# EAGLE board SparkFun_Pi_Wedge_40-Pin_PreAssembled_Panel_v10 (EAGLE 7.5.0), part 1 of 2
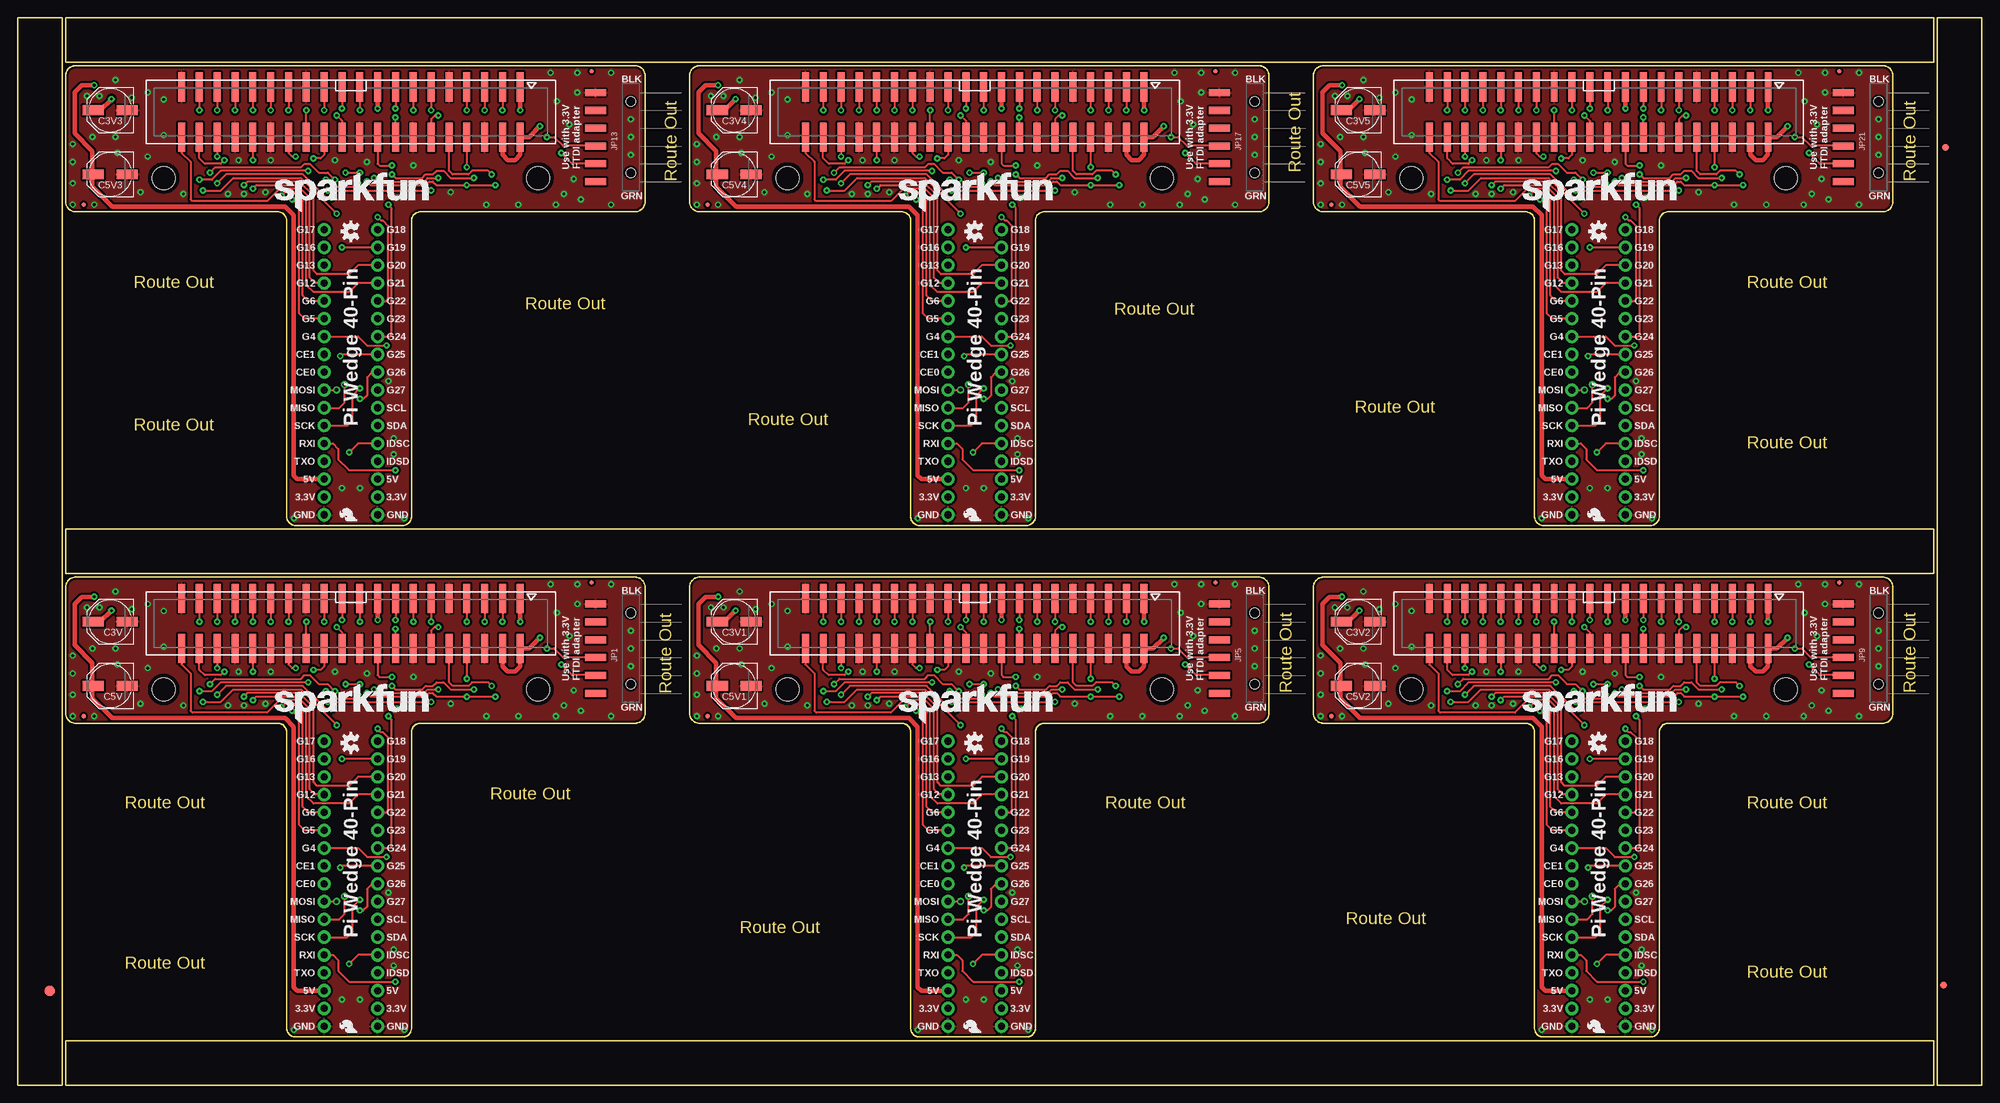
[diagram p0: board, top side]
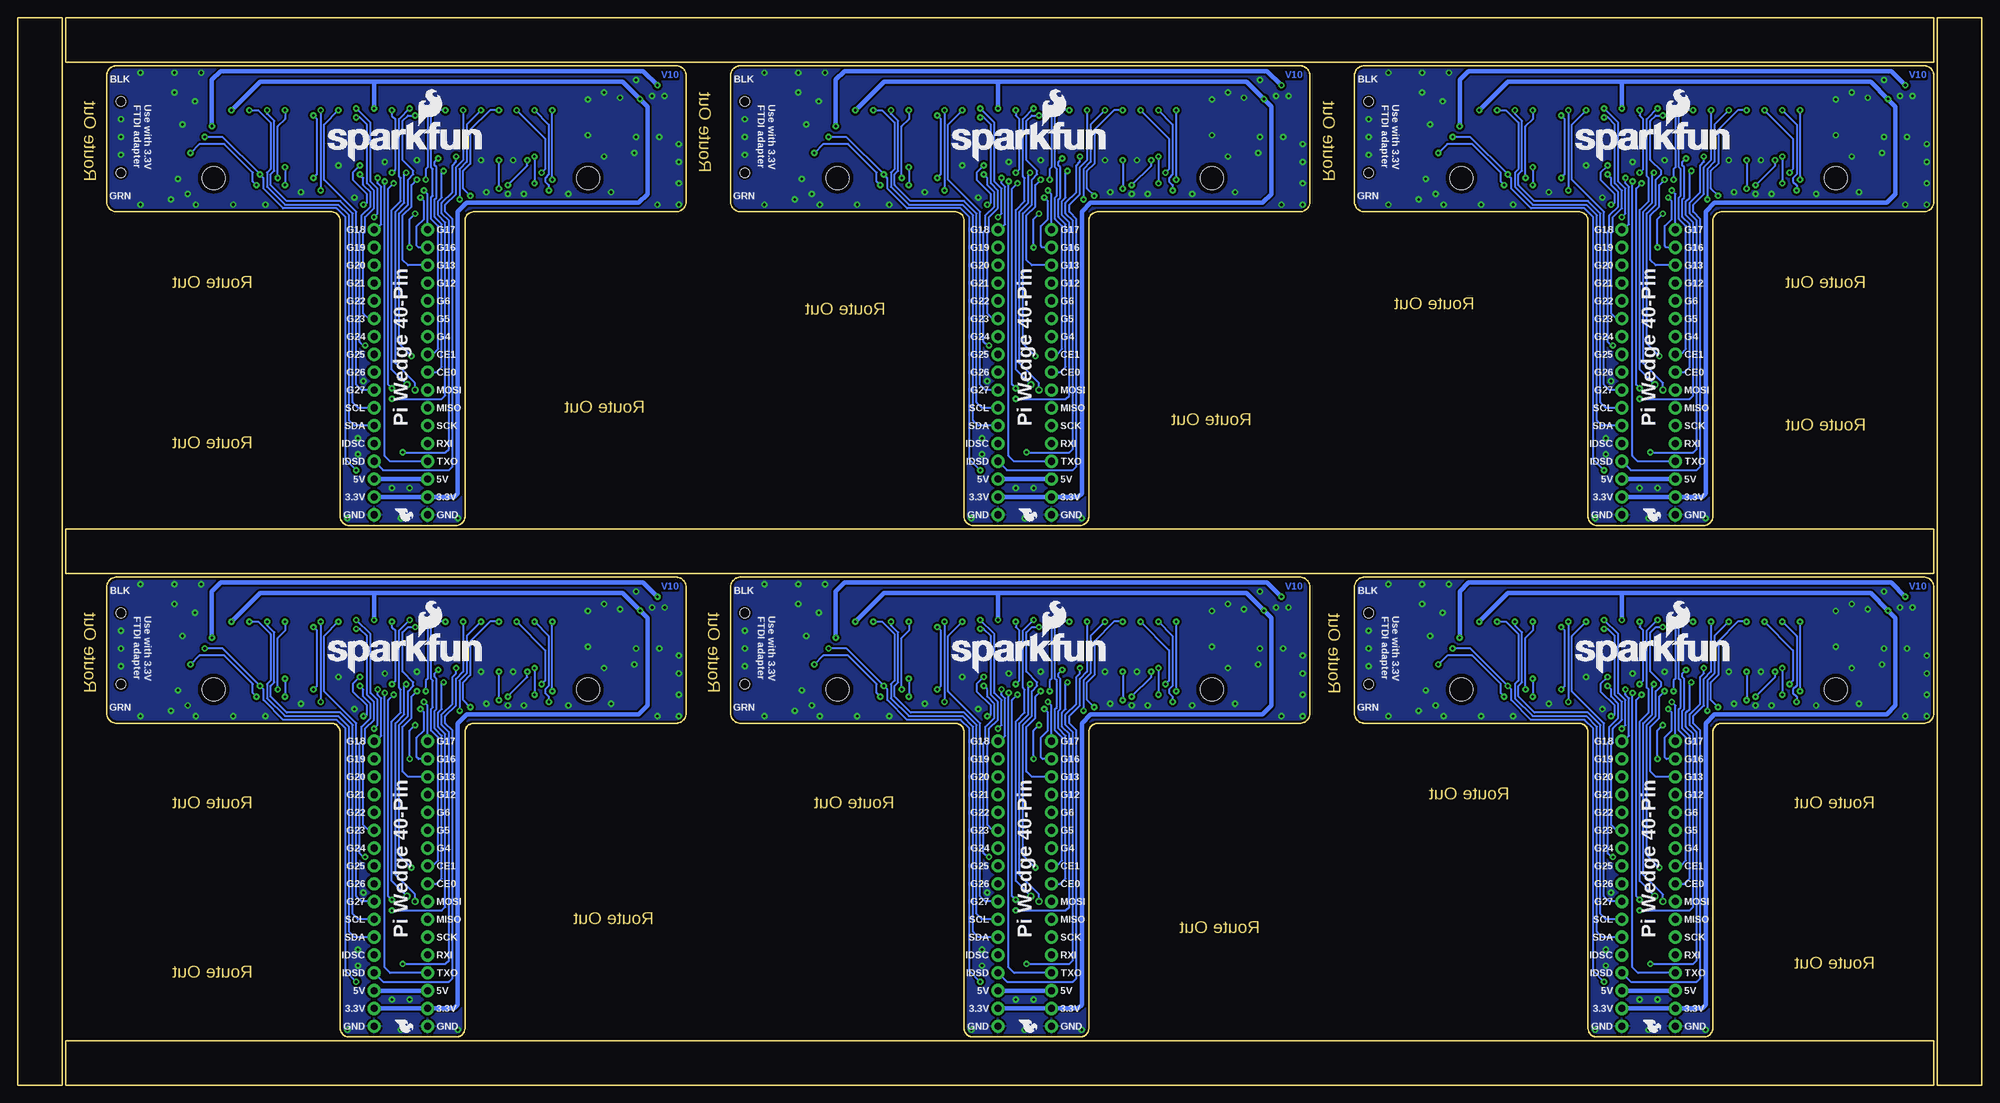
[diagram p1: board, bottom side, seen from below]

Size 279.91 x 152.15 mm. Coordinates in mm from the lower left corner, seen from the top.
Outline: 6.35,109.22 6.35,0 0,0 0,59.69
Outline: 0,57.15 0,152.15 6.35,152.15 6.35,106.68
Outline: 100.08,0 6.86,0 6.86,6.35 50.55,6.35
Outline: 48.01,6.35 273.05,6.35 273.05,0 97.54,0
Outline: 273.56,52.58 273.56,152.15 279.91,152.15 279.91,102.11
Outline: 279.91,104.65 279.91,0 273.56,0 273.56,55.12
Outline: 194.82,152.15 273.05,152.15 273.05,145.8 244.35,145.8
Outline: 246.89,145.8 6.86,145.8 6.86,152.15 197.36,152.15
Outline: 100.08,72.9 6.86,72.9 6.86,79.25 50.55,79.25
Outline: 48.01,79.25 273.05,79.25 273.05,72.9 97.54,72.9
Outline: 89.41,70.95 89.41,53 arc-90 87.97,51.56 57.4,51.56 arc90 56.13,50.29 56.13,8.13 arc-90 54.86,6.86 39.62,6.86 arc-90 38.35,8.13 38.35,50.29 arc90 37.08,51.56 8.29,51.56 arc-90 6.86,53 6.86,70.95 arc-90 8.29,72.39 87.97,72.39 arc-90 89.41,70.95
Outline: 178.31,70.95 178.31,53 arc-90 176.87,51.56 146.3,51.56 arc90 145.03,50.29 145.03,8.13 arc-90 143.76,6.86 128.52,6.86 arc-90 127.25,8.13 127.25,50.29 arc90 125.98,51.56 97.19,51.56 arc-90 95.76,53 95.76,70.95 arc-90 97.19,72.39 176.87,72.39 arc-90 178.31,70.95
Outline: 267.21,70.95 267.21,53 arc-90 265.77,51.56 235.2,51.56 arc90 233.93,50.29 233.93,8.13 arc-90 232.66,6.86 217.42,6.86 arc-90 216.15,8.13 216.15,50.29 arc90 214.88,51.56 186.09,51.56 arc-90 184.66,53 184.66,70.95 arc-90 186.09,72.39 265.77,72.39 arc-90 267.21,70.95
Outline: 89.41,143.85 89.41,125.9 arc-90 87.97,124.46 57.4,124.46 arc90 56.13,123.19 56.13,81.03 arc-90 54.86,79.76 39.62,79.76 arc-90 38.35,81.03 38.35,123.19 arc90 37.08,124.46 8.29,124.46 arc-90 6.86,125.9 6.86,143.85 arc-90 8.29,145.29 87.97,145.29 arc-90 89.41,143.85
Outline: 178.31,143.85 178.31,125.9 arc-90 176.87,124.46 146.3,124.46 arc90 145.03,123.19 145.03,81.03 arc-90 143.76,79.76 128.52,79.76 arc-90 127.25,81.03 127.25,123.19 arc90 125.98,124.46 97.19,124.46 arc-90 95.76,125.9 95.76,143.85 arc-90 97.19,145.29 176.87,145.29 arc-90 178.31,143.85
Outline: 267.21,143.85 267.21,125.9 arc-90 265.77,124.46 235.2,124.46 arc90 233.93,123.19 233.93,81.03 arc-90 232.66,79.76 217.42,79.76 arc-90 216.15,81.03 216.15,123.19 arc90 214.88,124.46 186.09,124.46 arc-90 184.66,125.9 184.66,143.85 arc-90 186.09,145.29 265.77,145.29 arc-90 267.21,143.85
Copper layers (1*16): Top 0.035mm / dielectric 1.5mm / Bottom 0.035mm
Design rules "SparkFun-2-layer": minimum track width 7mil, minimum drill 15mil, track to track 8mil, track to pad 8mil, pad to pad 8mil, via to via 8mil, smd to smd 8mil, copper to edge 8mil, drill to drill 8mil, minimum pad ring 12mil, minimum via ring 10mil, stop-mask expansion 4mil, vias tented up to drill 20mil, thermal gap 10mil

## Footprints (pad centres in the part's own frame; a part is rotated, then mirrored left to right if it is on the bottom)
PANASONIC_D = smd 3 x 1.4: + 2.4,0; - -2.4,0
FIDUCIAL-1.5X3 = smd 1.5 x 1.5: 1 0,0
FIDUCIAL-1X2 = smd 1 x 1: 1 0,0
MICRO-FIDUCIAL = smd 0.635 x 0.635: 1 0,0
FTDI_DEVICE_RA_SMT = smd 1 x 3: 1 -6.35,5; 2 -3.81,5; 3 -1.27,5; 4 1.27,5; 5 3.81,5; 6 6.35,5 | hole 1.4: -5.08,0; 5.08,0
2X20-SHROUDED-SMT = smd 4.14 x 0.991: 1 -3.569,24.13; 2 3.569,24.13; 3 -3.569,21.59; 4 3.569,21.59; 5 -3.569,19.05; 6 3.569,19.05; 7 -3.569,16.51; 8 3.569,16.51; 9 -3.569,13.97; 10 3.569,13.97; 11 -3.569,11.43; 12 3.569,11.43; 13 -3.569,8.89; 14 3.569,8.89; 15 -3.569,6.35; 16 3.569,6.35; 17 -3.569,3.81; 18 3.569,3.81; 19 -3.569,1.27; 20 3.569,1.27; 21 -3.569,-1.27; 22 3.569,-1.27; 23 -3.569,-3.81; 24 3.569,-3.81; 25 -3.569,-6.35; 26 3.569,-6.35; 27 -3.569,-8.89; 28 3.569,-8.89; 29 -3.569,-11.43; 30 3.569,-11.43; 31 -3.569,-13.97; 32 3.569,-13.97; 33 -3.569,-16.51; 34 3.569,-16.51; 35 -3.569,-19.05; 36 3.569,-19.05; 37 -3.569,-21.59; 38 3.569,-21.59; 39 -3.569,-24.13; 40 3.569,-24.13
1X17_NO_SILK_KIT = drill 1.016 pad 1.88: 1 0,0; 2 2.54,0; 3 5.08,0; 4 7.62,0; 5 10.16,0; 6 12.7,0; 7 15.24,0; 8 17.78,0; 9 20.32,0; 10 22.86,0; 11 25.4,0; 12 27.94,0; 13 30.48,0; 14 33.02,0; 15 35.56,0; 16 38.1,0; 17 40.64,0
STAND-OFF = hole 3.302: 0,0

## Placement (x,y rotation side)
C3V  10uf  [PANASONIC_D]  13.21,66.04 180 top
C3V1  10uf  [PANASONIC_D]  102.11,66.04 180 top
C3V2  10uf  [PANASONIC_D]  191.01,66.04 180 top
C3V3  10uf  [PANASONIC_D]  13.21,138.94 180 top
C3V4  10uf  [PANASONIC_D]  102.11,138.94 180 top
C3V5  10uf  [PANASONIC_D]  191.01,138.94 180 top
C5V  10uf  [PANASONIC_D]  13.21,56.9 180 top
C5V1  10uf  [PANASONIC_D]  102.11,56.9 180 top
C5V2  10uf  [PANASONIC_D]  191.01,56.9 180 top
C5V3  10uf  [PANASONIC_D]  13.21,129.79 180 top
C5V4  10uf  [PANASONIC_D]  102.11,129.79 180 top
C5V5  10uf  [PANASONIC_D]  191.01,129.79 180 top
E$1  [FIDUCIAL-1.5X3]  4.57,13.46 0 top
E$5  [FIDUCIAL-1X2]  274.7,133.6 180 top
E$6  [FIDUCIAL-1X2]  274.45,14.22 0 top
FID1  FIDUCIALUFIDUCIAL  [MICRO-FIDUCIAL]  81.79,71.63 0 top
FID2  FIDUCIALUFIDUCIAL  [MICRO-FIDUCIAL]  9.4,52.58 0 top
FID3  FIDUCIALUFIDUCIAL  [MICRO-FIDUCIAL]  170.69,71.63 0 top
FID4  FIDUCIALUFIDUCIAL  [MICRO-FIDUCIAL]  98.3,52.58 0 top
FID5  FIDUCIALUFIDUCIAL  [MICRO-FIDUCIAL]  259.59,71.63 0 top
FID6  FIDUCIALUFIDUCIAL  [MICRO-FIDUCIAL]  187.2,52.58 0 top
FID7  FIDUCIALUFIDUCIAL  [MICRO-FIDUCIAL]  81.79,144.53 0 top
FID8  FIDUCIALUFIDUCIAL  [MICRO-FIDUCIAL]  9.4,125.48 0 top
FID9  FIDUCIALUFIDUCIAL  [MICRO-FIDUCIAL]  170.69,144.53 0 top
FID10  FIDUCIALUFIDUCIAL  [MICRO-FIDUCIAL]  98.3,125.48 0 top
FID11  FIDUCIALUFIDUCIAL  [MICRO-FIDUCIAL]  259.59,144.53 0 top
FID12  FIDUCIALUFIDUCIAL  [MICRO-FIDUCIAL]  187.2,125.48 0 top
JP1  FTDI Device  [FTDI_DEVICE_RA_SMT]  87.38,62.2 90 top
JP2  RASPBERRYPI-40-PIN-GPIO-SMT  [2X20-SHROUDED-SMT]  47.5,65.79 270 top
JP3  1x17  [1X17_NO_SILK_KIT]  43.69,8.38 90 bottom
JP4  1x17  [1X17_NO_SILK_KIT]  51.31,8.38 90 bottom
JP5  FTDI Device  [FTDI_DEVICE_RA_SMT]  176.28,62.2 90 top
JP6  RASPBERRYPI-40-PIN-GPIO-SMT  [2X20-SHROUDED-SMT]  136.4,65.79 270 top
JP7  1x17  [1X17_NO_SILK_KIT]  132.59,8.38 90 bottom
JP8  1x17  [1X17_NO_SILK_KIT]  140.21,8.38 90 bottom
JP9  FTDI Device  [FTDI_DEVICE_RA_SMT]  265.18,62.2 90 top
JP10  RASPBERRYPI-40-PIN-GPIO-SMT  [2X20-SHROUDED-SMT]  225.3,65.79 270 top
JP11  1x17  [1X17_NO_SILK_KIT]  221.49,8.38 90 bottom
JP12  1x17  [1X17_NO_SILK_KIT]  229.11,8.38 90 bottom
JP13  FTDI Device  [FTDI_DEVICE_RA_SMT]  87.38,135.1 90 top
JP14  RASPBERRYPI-40-PIN-GPIO-SMT  [2X20-SHROUDED-SMT]  47.5,138.68 270 top
JP15  1x17  [1X17_NO_SILK_KIT]  43.69,81.28 90 bottom
JP16  1x17  [1X17_NO_SILK_KIT]  51.31,81.28 90 bottom
JP17  FTDI Device  [FTDI_DEVICE_RA_SMT]  176.28,135.1 90 top
JP18  RASPBERRYPI-40-PIN-GPIO-SMT  [2X20-SHROUDED-SMT]  136.4,138.68 270 top
JP19  1x17  [1X17_NO_SILK_KIT]  132.59,81.28 90 bottom
JP20  1x17  [1X17_NO_SILK_KIT]  140.21,81.28 90 bottom
JP21  FTDI Device  [FTDI_DEVICE_RA_SMT]  265.18,135.1 90 top
JP22  RASPBERRYPI-40-PIN-GPIO-SMT  [2X20-SHROUDED-SMT]  225.3,138.68 270 top
JP23  1x17  [1X17_NO_SILK_KIT]  221.49,81.28 90 bottom
JP24  1x17  [1X17_NO_SILK_KIT]  229.11,81.28 90 bottom
LOGO1  SFE_LOGO_NAME.2_INCH  [SFE_LOGO_NAME_.2]  36.7,51.56 0 top
LOGO2  SFE_LOGO_NAME_FLAME.2_INCH  [SFE_LOGO_NAME_FLAME_.2]  58.55,58.67 0 bottom
LOGO3  SFE_LOGO_FLAME.1_INCH  [SFE_LOGO_FLAME_.1]  48.77,7.24 90 top
LOGO4  SFE_LOGO_FLAME.1_INCH  [SFE_LOGO_FLAME_.1]  48.64,9.53 270 bottom
LOGO5  OSHW-LOGOS  [OSHW-LOGO-S]  47.5,48.77 90 top
LOGO6  SFE_LOGO_NAME.2_INCH  [SFE_LOGO_NAME_.2]  125.6,51.56 0 top
LOGO7  SFE_LOGO_NAME_FLAME.2_INCH  [SFE_LOGO_NAME_FLAME_.2]  147.45,58.67 0 bottom
LOGO8  SFE_LOGO_FLAME.1_INCH  [SFE_LOGO_FLAME_.1]  137.67,7.24 90 top
LOGO9  SFE_LOGO_FLAME.1_INCH  [SFE_LOGO_FLAME_.1]  137.54,9.53 270 bottom
LOGO10  OSHW-LOGOS  [OSHW-LOGO-S]  136.4,48.77 90 top
LOGO11  SFE_LOGO_NAME.2_INCH  [SFE_LOGO_NAME_.2]  214.5,51.56 0 top
LOGO12  SFE_LOGO_NAME_FLAME.2_INCH  [SFE_LOGO_NAME_FLAME_.2]  236.35,58.67 0 bottom
LOGO13  SFE_LOGO_FLAME.1_INCH  [SFE_LOGO_FLAME_.1]  226.57,7.24 90 top
LOGO14  SFE_LOGO_FLAME.1_INCH  [SFE_LOGO_FLAME_.1]  226.44,9.53 270 bottom
LOGO15  OSHW-LOGOS  [OSHW-LOGO-S]  225.3,48.77 90 top
LOGO16  SFE_LOGO_NAME.2_INCH  [SFE_LOGO_NAME_.2]  36.7,124.46 0 top
LOGO17  SFE_LOGO_NAME_FLAME.2_INCH  [SFE_LOGO_NAME_FLAME_.2]  58.55,131.57 0 bottom
LOGO18  SFE_LOGO_FLAME.1_INCH  [SFE_LOGO_FLAME_.1]  48.77,80.14 90 top
LOGO19  SFE_LOGO_FLAME.1_INCH  [SFE_LOGO_FLAME_.1]  48.64,82.42 270 bottom
LOGO20  OSHW-LOGOS  [OSHW-LOGO-S]  47.5,121.67 90 top
LOGO21  SFE_LOGO_NAME.2_INCH  [SFE_LOGO_NAME_.2]  125.6,124.46 0 top
LOGO22  SFE_LOGO_NAME_FLAME.2_INCH  [SFE_LOGO_NAME_FLAME_.2]  147.45,131.57 0 bottom
LOGO23  SFE_LOGO_FLAME.1_INCH  [SFE_LOGO_FLAME_.1]  137.67,80.14 90 top
LOGO24  SFE_LOGO_FLAME.1_INCH  [SFE_LOGO_FLAME_.1]  137.54,82.42 270 bottom
LOGO25  OSHW-LOGOS  [OSHW-LOGO-S]  136.4,121.67 90 top
LOGO26  SFE_LOGO_NAME.2_INCH  [SFE_LOGO_NAME_.2]  214.5,124.46 0 top
LOGO27  SFE_LOGO_NAME_FLAME.2_INCH  [SFE_LOGO_NAME_FLAME_.2]  236.35,131.57 0 bottom
LOGO28  SFE_LOGO_FLAME.1_INCH  [SFE_LOGO_FLAME_.1]  226.57,80.14 90 top
LOGO29  SFE_LOGO_FLAME.1_INCH  [SFE_LOGO_FLAME_.1]  226.44,82.42 270 bottom
LOGO30  OSHW-LOGOS  [OSHW-LOGO-S]  225.3,121.67 90 top
STANDOFF1  STAND-OFF  [STAND-OFF]  20.83,56.39 0 top
STANDOFF2  STAND-OFF  [STAND-OFF]  74.17,56.39 0 top
STANDOFF3  STAND-OFF  [STAND-OFF]  109.73,56.39 0 top
STANDOFF4  STAND-OFF  [STAND-OFF]  163.07,56.39 0 top
STANDOFF5  STAND-OFF  [STAND-OFF]  198.63,56.39 0 top
STANDOFF6  STAND-OFF  [STAND-OFF]  251.97,56.39 0 top
STANDOFF7  STAND-OFF  [STAND-OFF]  20.83,129.29 0 top
STANDOFF8  STAND-OFF  [STAND-OFF]  74.17,129.29 0 top
STANDOFF9  STAND-OFF  [STAND-OFF]  109.73,129.29 0 top
STANDOFF10  STAND-OFF  [STAND-OFF]  163.07,129.29 0 top
STANDOFF11  STAND-OFF  [STAND-OFF]  198.63,129.29 0 top
STANDOFF12  STAND-OFF  [STAND-OFF]  251.97,129.29 0 top

## Library data of the parts
C3V C3V1-C3V5 C5V C5V1-C5V5 = SparkFun-Capacitors; PROD_ID: CAP-10547
E$1 = SparkFun-Retired
E$5 E$6 FID1-FID12 LOGO1-LOGO30 = SparkFun-Aesthetics
JP1 JP5 JP9 JP13 JP17 JP21 = SparkFun-Connectors; PROD_ID: CONN-08971
JP2 JP6 JP10 JP14 JP18 JP22 = SparkFun-Boards; PROD_ID: CONN-13143
JP3 JP4 JP7 JP8 JP11 JP12 JP15 JP16 JP19 JP20 JP23 JP24 = SparkFun-Connectors; PROD_ID: CONN-12294
STANDOFF1-STANDOFF12 = SparkFun-Electromechanical

## Nets
3.3V: C3V.+ JP2.1 JP2.17 JP3.2 JP4.2
3.3V1: C3V1.+ JP6.1 JP6.17 JP7.2 JP8.2
3.3V2: C3V2.+ JP10.1 JP10.17 JP11.2 JP12.2
3.3V3: C3V3.+ JP14.1 JP14.17 JP15.2 JP16.2
3.3V4: C3V4.+ JP18.1 JP18.17 JP19.2 JP20.2
3.3V5: C3V5.+ JP22.1 JP22.17 JP23.2 JP24.2
5V: C5V.+ JP2.2 JP2.4 JP3.3 JP4.3
5V1: C5V1.+ JP6.2 JP6.4 JP7.3 JP8.3
5V2: C5V2.+ JP10.2 JP10.4 JP11.3 JP12.3
5V3: C5V3.+ JP14.2 JP14.4 JP15.3 JP16.3
5V4: C5V4.+ JP18.2 JP18.4 JP19.3 JP20.3
5V5: C5V5.+ JP22.2 JP22.4 JP23.3 JP24.3
CE0: JP2.24 JP3.9
CE1: JP2.26 JP3.10
CE2: JP6.24 JP7.9
CE3: JP6.26 JP7.10
CE4: JP10.24 JP11.9
CE5: JP10.26 JP11.10
CE6: JP14.24 JP15.9
CE7: JP14.26 JP15.10
CE8: JP18.24 JP19.9
CE9: JP18.26 JP19.10
CE10: JP22.24 JP23.9
CE11: JP22.26 JP23.10
GND: C3V.- C5V.- JP1.6 JP2.6 JP2.9 JP2.14 JP2.20 JP2.25 JP2.30 JP2.34 JP2.39 JP3.1 JP4.1
GND1: C3V1.- C5V1.- JP5.6 JP6.6 JP6.9 JP6.14 JP6.20 JP6.25 JP6.30 JP6.34 JP6.39 JP7.1 JP8.1
GND2: C3V2.- C5V2.- JP9.6 JP10.6 JP10.9 JP10.14 JP10.20 JP10.25 JP10.30 JP10.34 JP10.39 JP11.1 JP12.1
GND3: C3V3.- C5V3.- JP13.6 JP14.6 JP14.9 JP14.14 JP14.20 JP14.25 JP14.30 JP14.34 JP14.39 JP15.1 JP16.1
GND4: C3V4.- C5V4.- JP17.6 JP18.6 JP18.9 JP18.14 JP18.20 JP18.25 JP18.30 JP18.34 JP18.39 JP19.1 JP20.1
GND5: C3V5.- C5V5.- JP21.6 JP22.6 JP22.9 JP22.14 JP22.20 JP22.25 JP22.30 JP22.34 JP22.39 JP23.1 JP24.1
GP1: JP6.7 JP7.11
GP2: JP6.13 JP8.8
GP3: JP6.22 JP8.10
GP4: JP2.7 JP3.11
GP5: JP2.29 JP3.12
GP6: JP2.31 JP3.13
GP7: JP6.18 JP8.11
GP8: JP6.16 JP8.12
GP9: JP6.15 JP8.13
GP10: JP6.12 JP8.17
GP11: JP6.11 JP7.17
GP12: JP2.32 JP3.14
GP13: JP2.33 JP3.15
GP14: JP6.29 JP7.12
GP15: JP6.31 JP7.13
GP16: JP2.36 JP3.16
GP17: JP2.11 JP3.17
GP18: JP2.12 JP4.17
GP19: JP2.35 JP4.16
GP20: JP2.38 JP4.15
GP21: JP2.40 JP4.14
GP22: JP2.15 JP4.13
GP23: JP2.16 JP4.12
GP24: JP2.18 JP4.11
GP25: JP2.22 JP4.10
GP26: JP2.37 JP4.9
GP27: JP2.13 JP4.8
GP28: JP6.32 JP7.14
GP29: JP6.33 JP7.15
GP30: JP6.36 JP7.16
GP31: JP6.35 JP8.16
GP32: JP6.38 JP8.15
GP33: JP6.40 JP8.14
GP34: JP6.37 JP8.9
GP35: JP10.7 JP11.11
GP36: JP10.13 JP12.8
GP37: JP10.22 JP12.10
GP38: JP10.18 JP12.11
GP39: JP10.16 JP12.12
GP40: JP10.15 JP12.13
GP41: JP10.12 JP12.17
GP42: JP10.11 JP11.17
GP43: JP10.29 JP11.12
GP44: JP10.31 JP11.13
GP45: JP10.32 JP11.14
GP46: JP10.33 JP11.15
GP47: JP10.36 JP11.16
GP48: JP10.35 JP12.16
GP49: JP10.38 JP12.15
GP50: JP10.40 JP12.14
GP51: JP10.37 JP12.9
GP52: JP14.7 JP15.11
GP53: JP14.13 JP16.8
GP54: JP14.22 JP16.10
GP55: JP14.18 JP16.11
GP56: JP14.16 JP16.12
GP57: JP14.15 JP16.13
GP58: JP14.12 JP16.17
GP59: JP14.11 JP15.17
GP60: JP14.29 JP15.12
GP61: JP14.31 JP15.13
GP62: JP14.32 JP15.14
GP63: JP14.33 JP15.15
GP64: JP14.36 JP15.16
GP65: JP14.35 JP16.16
GP66: JP14.38 JP16.15
GP67: JP14.40 JP16.14
GP68: JP14.37 JP16.9
GP69: JP18.7 JP19.11
GP70: JP18.13 JP20.8
GP71: JP18.22 JP20.10
GP72: JP18.18 JP20.11
GP73: JP18.16 JP20.12
GP74: JP18.15 JP20.13
GP75: JP18.12 JP20.17
GP76: JP18.11 JP19.17
GP77: JP18.29 JP19.12
GP78: JP18.31 JP19.13
GP79: JP18.32 JP19.14
GP80: JP18.33 JP19.15
GP81: JP18.36 JP19.16
GP82: JP18.35 JP20.16
GP83: JP18.38 JP20.15
GP84: JP18.40 JP20.14
GP85: JP18.37 JP20.9
GP86: JP22.7 JP23.11
GP87: JP22.13 JP24.8
GP88: JP22.22 JP24.10
GP89: JP22.18 JP24.11
GP90: JP22.16 JP24.12
GP91: JP22.15 JP24.13
GP92: JP22.12 JP24.17
GP93: JP22.11 JP23.17
GP94: JP22.29 JP23.12
GP95: JP22.31 JP23.13
GP96: JP22.32 JP23.14
GP97: JP22.33 JP23.15
GP98: JP22.36 JP23.16
GP99: JP22.35 JP24.16
GP100: JP22.38 JP24.15
GP101: JP22.40 JP24.14
GP102: JP22.37 JP24.9
ID_SC: JP2.28 JP4.5
ID_SC1: JP6.28 JP8.5
ID_SC2: JP10.28 JP12.5
ID_SC3: JP14.28 JP16.5
ID_SC4: JP18.28 JP20.5
ID_SC5: JP22.28 JP24.5
ID_SD: JP2.27 JP4.4
ID_SD1: JP6.27 JP8.4
ID_SD2: JP10.27 JP12.4
ID_SD3: JP14.27 JP16.4
ID_SD4: JP18.27 JP20.4
ID_SD5: JP22.27 JP24.4
MISO: JP2.21 JP3.7
MISO1: JP6.21 JP7.7
MISO2: JP10.21 JP11.7
MISO3: JP14.21 JP15.7
MISO4: JP18.21 JP19.7
MISO5: JP22.21 JP23.7
MOSI: JP2.19 JP3.8
MOSI1: JP6.19 JP7.8
MOSI2: JP10.19 JP11.8
MOSI3: JP14.19 JP15.8
MOSI4: JP18.19 JP19.8
MOSI5: JP22.19 JP23.8
RXI: JP1.3 JP2.10 JP3.5
RXI1: JP5.3 JP6.10 JP7.5
RXI2: JP9.3 JP10.10 JP11.5
RXI3: JP13.3 JP14.10 JP15.5
RXI4: JP17.3 JP18.10 JP19.5
RXI5: JP21.3 JP22.10 JP23.5
SCL: JP2.5 JP4.7
SCL1: JP6.5 JP8.7
SCL2: JP10.5 JP12.7
SCL3: JP14.5 JP16.7
SCL4: JP18.5 JP20.7
SCL5: JP22.5 JP24.7
SCLK: JP2.23 JP3.6
SCLK1: JP6.23 JP7.6
SCLK2: JP10.23 JP11.6
SCLK3: JP14.23 JP15.6
SCLK4: JP18.23 JP19.6
SCLK5: JP22.23 JP23.6
SDA: JP2.3 JP4.6
SDA1: JP6.3 JP8.6
SDA2: JP10.3 JP12.6
SDA3: JP14.3 JP16.6
SDA4: JP18.3 JP20.6
SDA5: JP22.3 JP24.6
TXO: JP1.2 JP2.8 JP3.4
TXO1: JP5.2 JP6.8 JP7.4
TXO2: JP9.2 JP10.8 JP11.4
TXO3: JP13.2 JP14.8 JP15.4
TXO4: JP17.2 JP18.8 JP19.4
TXO5: JP21.2 JP22.8 JP23.4

## Tracks (layer width: path | path; a pad name or v marks a point on that pad's centre or on a via)
3.3V  (via drill 0.38)
  Top 0.61: v71.63,66.04 JP2.1 | JP2.17 v51.31,66.29 | C3V.+ 11.81,66.04 v13.4,67.63 13.34,67.56
  Bottom 0.61: JP4.2 JP3.2 39.88,10.92 39.37,11.43 39.37,51.56 38.1,52.83 13.59,52.83 12.32,54.1 12.32,66.55 v13.4,67.63 15.88,70.1 51.31,70.1 | 51.31,70.1 67.56,70.1 v71.63,66.04 | v51.31,66.29 51.31,70.1
3.3V1  (via drill 0.38)
  Top 0.61: v160.53,66.04 JP6.1 | JP6.17 v140.21,66.29 | C3V1.+ 100.71,66.04 v102.3,67.63 102.23,67.56
  Bottom 0.61: JP8.2 JP7.2 128.78,10.92 128.27,11.43 128.27,51.56 127,52.83 102.49,52.83 101.22,54.1 101.22,66.55 v102.3,67.63 104.78,70.1 140.21,70.1 | 140.21,70.1 156.46,70.1 v160.53,66.04 | v140.21,66.29 140.21,70.1
3.3V2  (via drill 0.38)
  Top 0.61: v249.43,66.04 JP10.1 | JP10.17 v229.11,66.29 | C3V2.+ 189.61,66.04 v191.2,67.63 191.13,67.56
  Bottom 0.61: JP12.2 JP11.2 217.68,10.92 217.17,11.43 217.17,51.56 215.9,52.83 191.39,52.83 190.12,54.1 190.12,66.55 v191.2,67.63 193.68,70.1 229.11,70.1 | 229.11,70.1 245.36,70.1 v249.43,66.04 | v229.11,66.29 229.11,70.1
3.3V3  (via drill 0.38)
  Top 0.61: v71.63,138.94 JP14.1 | JP14.17 v51.31,139.19 | C3V3.+ 11.81,138.94 v13.4,140.53 13.34,140.46
  Bottom 0.61: JP16.2 JP15.2 39.88,83.82 39.37,84.33 39.37,124.46 38.1,125.73 13.59,125.73 12.32,127 12.32,139.45 v13.4,140.53 15.88,143 51.31,143 | 51.31,143 67.56,143 v71.63,138.94 | v51.31,139.19 51.31,143
3.3V4  (via drill 0.38)
  Top 0.61: v160.53,138.94 JP18.1 | JP18.17 v140.21,139.19 | C3V4.+ 100.71,138.94 v102.3,140.53 102.23,140.46
  Bottom 0.61: JP20.2 JP19.2 128.78,83.82 128.27,84.33 128.27,124.46 127,125.73 102.49,125.73 101.22,127 101.22,139.45 v102.3,140.53 104.78,143 140.21,143 | 140.21,143 156.46,143 v160.53,138.94 | v140.21,139.19 140.21,143
3.3V5  (via drill 0.38)
  Top 0.61: v249.43,138.94 JP22.1 | JP22.17 v229.11,139.19 | C3V5.+ 189.61,138.94 v191.2,140.53 191.13,140.46
  Bottom 0.61: JP24.2 JP23.2 217.68,83.82 217.17,84.33 217.17,124.46 215.9,125.73 191.39,125.73 190.12,127 190.12,139.45 v191.2,140.53 193.68,143 229.11,143 | 229.11,143 245.36,143 v249.43,138.94 | v229.11,139.19 229.11,143
5V  (via drill 0.38)
  Top 0.254: 11.06,56.78 10.67,56.39
  Top 0.61: JP3.3 39.88,13.46 39.37,13.97 39.37,51.05 38.1,52.32 13.46,52.32 10.67,55.12 10.67,56.39 10.67,56.9 | 10.67,56.9 10.67,60.2 8.13,62.74 8.13,68.58 9.14,69.6 v10.92,69.6 | 10.67,56.9 C5V.+ | JP2.4 69.09,59.69 69.85,58.93 70.87,58.93 71.63,59.69 JP2.2 72.89,62.22 v74.42,63.75
  Bottom 0.61: JP3.3 JP4.3 | v10.92,69.6 12.95,71.63 73.15,71.63 74.42,70.36 v74.42,63.75
5V1  (via drill 0.38)
  Top 0.254: 99.96,56.78 99.57,56.39
  Top 0.61: JP7.3 128.78,13.46 128.27,13.97 128.27,51.05 127,52.32 102.36,52.32 99.57,55.12 99.57,56.39 99.57,56.9 | 99.57,56.9 99.57,60.2 97.03,62.74 97.03,68.58 98.04,69.6 v99.82,69.6 | 99.57,56.9 C5V1.+ | JP6.4 157.99,59.69 158.75,58.93 159.77,58.93 160.53,59.69 JP6.2 161.78,62.22 v163.32,63.75
  Bottom 0.61: JP7.3 JP8.3 | v99.82,69.6 101.85,71.63 162.05,71.63 163.32,70.36 v163.32,63.75
5V2  (via drill 0.38)
  Top 0.254: 188.86,56.78 188.47,56.39
  Top 0.61: JP11.3 217.68,13.46 217.17,13.97 217.17,51.05 215.9,52.32 191.26,52.32 188.47,55.12 188.47,56.39 188.47,56.9 | 188.47,56.9 188.47,60.2 185.93,62.74 185.93,68.58 186.94,69.6 v188.72,69.6 | 188.47,56.9 C5V2.+ | JP10.4 246.89,59.69 247.65,58.93 248.67,58.93 249.43,59.69 JP10.2 250.69,62.22 v252.22,63.75
  Bottom 0.61: JP11.3 JP12.3 | v188.72,69.6 190.75,71.63 250.95,71.63 252.22,70.36 v252.22,63.75
5V3  (via drill 0.38)
  Top 0.254: 11.06,129.68 10.67,129.29
  Top 0.61: JP15.3 39.88,86.36 39.37,86.87 39.37,123.95 38.1,125.22 13.46,125.22 10.67,128.02 10.67,129.29 10.67,129.79 | 10.67,129.79 10.67,133.1 8.13,135.64 8.13,141.48 9.14,142.49 v10.92,142.49 | 10.67,129.79 C5V3.+ | JP14.4 69.09,132.59 69.85,131.83 70.87,131.83 71.63,132.59 JP14.2 72.89,135.12 v74.42,136.65
  Bottom 0.61: JP15.3 JP16.3 | v10.92,142.49 12.95,144.53 73.15,144.53 74.42,143.26 v74.42,136.65
5V4  (via drill 0.38)
  Top 0.254: 99.96,129.68 99.57,129.29
  Top 0.61: JP19.3 128.78,86.36 128.27,86.87 128.27,123.95 127,125.22 102.36,125.22 99.57,128.02 99.57,129.29 99.57,129.79 | 99.57,129.79 99.57,133.1 97.03,135.64 97.03,141.48 98.04,142.49 v99.82,142.49 | 99.57,129.79 C5V4.+ | JP18.4 157.99,132.59 158.75,131.83 159.77,131.83 160.53,132.59 JP18.2 161.78,135.12 v163.32,136.65
  Bottom 0.61: JP19.3 JP20.3 | v99.82,142.49 101.85,144.53 162.05,144.53 163.32,143.26 v163.32,136.65
5V5  (via drill 0.38)
  Top 0.254: 188.86,129.68 188.47,129.29
  Top 0.61: JP23.3 217.68,86.36 217.17,86.87 217.17,123.95 215.9,125.22 191.26,125.22 188.47,128.02 188.47,129.29 188.47,129.79 | 188.47,129.79 188.47,133.1 185.93,135.64 185.93,141.48 186.94,142.49 v188.72,142.49 | 188.47,129.79 C5V5.+ | JP22.4 246.89,132.59 247.65,131.83 248.67,131.83 249.43,132.59 JP22.2 250.69,135.12 v252.22,136.65
  Bottom 0.61: JP23.3 JP24.3 | v188.72,142.49 190.75,144.53 250.95,144.53 252.22,143.26 v252.22,136.65
CE0  (via drill 0.38)
  Top 0.254: JP2.24 43.69,59.69 43.18,59.18 v42.16,59.18
  Bottom 0.254: JP3.9 42.42,28.7 41.66,29.46 41.66,49.78 42.67,50.8 42.67,53.34 42.42,53.59 42.42,57.91 42.67,58.17 42.67,58.67 v42.16,59.18
CE1  (via drill 0.38)
  Top 0.254: JP2.26 v41.15,66.04
  Bottom 0.254: JP3.10 42.93,31.24 42.16,32 42.16,49.53 43.18,50.55 43.18,53.59 42.93,53.85 42.93,57.66 43.18,57.91 43.18,65.28 42.42,66.04 v41.15,66.04
CE2  (via drill 0.38)
  Top 0.254: JP6.24 132.59,59.69 132.08,59.18 v131.06,59.18
  Bottom 0.254: JP7.9 131.32,28.7 130.56,29.46 130.56,49.78 131.57,50.8 131.57,53.34 131.32,53.59 131.32,57.91 131.57,58.17 131.57,58.67 v131.06,59.18
CE3  (via drill 0.38)
  Top 0.254: JP6.26 v130.05,66.04
  Bottom 0.254: JP7.10 131.83,31.24 131.06,32 131.06,49.53 132.08,50.55 132.08,53.59 131.83,53.85 131.83,57.66 132.08,57.91 132.08,65.28 131.32,66.04 v130.05,66.04
CE4  (via drill 0.38)
  Top 0.254: JP10.24 221.49,59.69 220.98,59.18 v219.96,59.18
  Bottom 0.254: JP11.9 220.22,28.7 219.46,29.46 219.46,49.78 220.47,50.8 220.47,53.34 220.22,53.59 220.22,57.91 220.47,58.17 220.47,58.67 v219.96,59.18
CE5  (via drill 0.38)
  Top 0.254: JP10.26 v218.95,66.04
  Bottom 0.254: JP11.10 220.73,31.24 219.96,32 219.96,49.53 220.98,50.55 220.98,53.59 220.73,53.85 220.73,57.66 220.98,57.91 220.98,65.28 220.22,66.04 v218.95,66.04
CE6  (via drill 0.38)
  Top 0.254: JP14.24 43.69,132.59 43.18,132.08 v42.16,132.08
  Bottom 0.254: JP15.9 42.42,101.6 41.66,102.36 41.66,122.68 42.67,123.7 42.67,126.24 42.42,126.49 42.42,130.81 42.67,131.06 42.67,131.57 v42.16,132.08
CE7  (via drill 0.38)
  Top 0.254: JP14.26 v41.15,138.94
  Bottom 0.254: JP15.10 42.93,104.14 42.16,104.9 42.16,122.43 43.18,123.44 43.18,126.49 42.93,126.75 42.93,130.56 43.18,130.81 43.18,138.18 42.42,138.94 v41.15,138.94
CE8  (via drill 0.38)
  Top 0.254: JP18.24 132.59,132.59 132.08,132.08 v131.06,132.08
  Bottom 0.254: JP19.9 131.32,101.6 130.56,102.36 130.56,122.68 131.57,123.7 131.57,126.24 131.32,126.49 131.32,130.81 131.57,131.06 131.57,131.57 v131.06,132.08
CE9  (via drill 0.38)
  Top 0.254: JP18.26 v130.05,138.94
  Bottom 0.254: JP19.10 131.83,104.14 131.06,104.9 131.06,122.43 132.08,123.44 132.08,126.49 131.83,126.75 131.83,130.56 132.08,130.81 132.08,138.18 131.32,138.94 v130.05,138.94
CE10  (via drill 0.38)
  Top 0.254: JP22.24 221.49,132.59 220.98,132.08 v219.96,132.08
  Bottom 0.254: JP23.9 220.22,101.6 219.46,102.36 219.46,122.68 220.47,123.7 220.47,126.24 220.22,126.49 220.22,130.81 220.47,131.06 220.47,131.57 v219.96,132.08
CE11  (via drill 0.38)
  Top 0.254: JP22.26 v218.95,138.94
  Bottom 0.254: JP23.10 220.73,104.14 219.96,104.9 219.96,122.43 220.98,123.44 220.98,126.49 220.73,126.75 220.73,130.56 220.98,130.81 220.98,138.18 220.22,138.94 v218.95,138.94
GND  (via drill 0.38)
  other vias: 46.23,12.19 48.77,12.19 79.76,68.58 79.25,56.26 80.26,53.34 71.37,52.58 11.68,68.07 9.91,68.07 13.97,62.23 10.92,52.58 7.87,61.21 16.26,67.82 52.83,27.43 77.85,54.1 14.22,59.94 20.83,67.56 20.83,62.48 29.97,54.1 23.62,54.1 7.87,52.58 7.87,55.63 7.87,58.67 13.97,70.36 10.67,62.23 18.54,68.58 18.54,59.44 17.53,54.36 66.8,52.58 76.71,52.58 84.58,52.58 84.58,71.37 79.76,71.37 75.95,71.37 35.31,54.36 32.26,54.1 78.61,64.01 76.83,67.31 53.59,17.02 53.59,19.3 55.12,7.87 39.37,7.87 47.5,7.87 61.72,54.36 56.39,58.17 54.1,53.59 49.78,58.67 45.21,58.93 36.07,58.93 31.5,58.93 87.38,59.69 87.38,62.23 87.38,64.77
  pour Bottom (isolate 0.305): 8.13,51.56 37.08,51.56 arc-90 38.35,50.29 38.35,8.13 arc90 39.62,6.86 54.86,6.86 arc90 56.13,8.13 56.13,50.29 arc-90 57.4,51.56 88.14,51.56 arc90 89.41,52.83 89.41,72.39 6.86,72.39 6.86,52.96 arc90
  pour Top (isolate 0.305): 56.13,50.29 56.13,8.13 arc-90 54.86,6.86 39.62,6.86 arc-90 38.35,8.13 38.35,50.29 arc90 37.08,51.56 8.13,51.56 arc-90 6.86,52.96 6.86,72.39 89.41,72.39 89.41,52.83 arc-90 88.14,51.56 57.4,51.56 arc90
GND1  (via drill 0.38)
  other vias: 135.13,12.19 137.67,12.19 168.66,68.58 168.15,56.26 169.16,53.34 160.27,52.58 100.58,68.07 98.81,68.07 102.87,62.23 99.82,52.58 96.77,61.21 105.16,67.82 141.73,27.43 166.75,54.1 103.12,59.94 109.73,67.56 109.73,62.48 118.87,54.1 112.52,54.1 96.77,52.58 96.77,55.63 96.77,58.67 102.87,70.36 99.57,62.23 107.44,68.58 107.44,59.44 106.43,54.36 155.7,52.58 165.61,52.58 173.48,52.58 173.48,71.37 168.66,71.37 164.85,71.37 124.21,54.36 121.16,54.1 167.51,64.01 165.74,67.31 142.49,17.02 142.49,19.3 144.02,7.87 128.27,7.87 136.4,7.87 150.62,54.36 145.29,58.17 143,53.59 138.68,58.67 134.11,58.93 124.97,58.93 120.4,58.93 176.28,59.69 176.28,62.23 176.28,64.77
  pour Bottom (isolate 0.305): 97.03,51.56 125.98,51.56 arc-90 127.25,50.29 127.25,8.13 arc90 128.52,6.86 143.76,6.86 arc90 145.03,8.13 145.03,50.29 arc-90 146.3,51.56 177.04,51.56 arc90 178.31,52.83 178.31,72.39 95.76,72.39 95.76,52.96 arc90
  pour Top (isolate 0.305): 145.03,50.29 145.03,8.13 arc-90 143.76,6.86 128.52,6.86 arc-90 127.25,8.13 127.25,50.29 arc90 125.98,51.56 97.03,51.56 arc-90 95.76,52.96 95.76,72.39 178.31,72.39 178.31,52.83 arc-90 177.04,51.56 146.3,51.56 arc90
GND2  (via drill 0.38)
  other vias: 224.03,12.19 226.57,12.19 257.56,68.58 257.05,56.26 258.06,53.34 249.17,52.58 189.48,68.07 187.71,68.07 191.77,62.23 188.72,52.58 185.67,61.21 194.06,67.82 230.63,27.43 255.65,54.1 192.02,59.94 198.63,67.56 198.63,62.48 207.77,54.1 201.42,54.1 185.67,52.58 185.67,55.63 185.67,58.67 191.77,70.36 188.47,62.23 196.34,68.58 196.34,59.44 195.33,54.36 244.6,52.58 254.51,52.58 262.38,52.58 262.38,71.37 257.56,71.37 253.75,71.37 213.11,54.36 210.06,54.1 256.41,64.01 254.63,67.31 231.39,17.02 231.39,19.3 232.92,7.87 217.17,7.87 225.3,7.87 239.52,54.36 234.19,58.17 231.9,53.59 227.58,58.67 223.01,58.93 213.87,58.93 209.3,58.93 265.18,59.69 265.18,62.23 265.18,64.77
  pour Bottom (isolate 0.305): 185.93,51.56 214.88,51.56 arc-90 216.15,50.29 216.15,8.13 arc90 217.42,6.86 232.66,6.86 arc90 233.93,8.13 233.93,50.29 arc-90 235.2,51.56 265.94,51.56 arc90 267.21,52.83 267.21,72.39 184.66,72.39 184.66,52.96 arc90
  pour Top (isolate 0.305): 233.93,50.29 233.93,8.13 arc-90 232.66,6.86 217.42,6.86 arc-90 216.15,8.13 216.15,50.29 arc90 214.88,51.56 185.93,51.56 arc-90 184.66,52.96 184.66,72.39 267.21,72.39 267.21,52.83 arc-90 265.94,51.56 235.2,51.56 arc90
GND3  (via drill 0.38)
  other vias: 46.23,85.09 48.77,85.09 79.76,141.48 79.25,129.16 80.26,126.24 71.37,125.48 11.68,140.97 9.91,140.97 13.97,135.13 10.92,125.48 7.87,134.11 16.26,140.72 52.83,100.33 77.85,127 14.22,132.84 20.83,140.46 20.83,135.38 29.97,127 23.62,127 7.87,125.48 7.87,128.52 7.87,131.57 13.97,143.26 10.67,135.13 18.54,141.48 18.54,132.33 17.53,127.25 66.8,125.48 76.71,125.48 84.58,125.48 84.58,144.27 79.76,144.27 75.95,144.27 35.31,127.25 32.26,127 78.61,136.91 76.83,140.21 53.59,89.92 53.59,92.2 55.12,80.77 39.37,80.77 47.5,80.77 61.72,127.25 56.39,131.06 54.1,126.49 49.78,131.57 45.21,131.83 36.07,131.83 31.5,131.83 87.38,132.59 87.38,135.13 87.38,137.67
  pour Bottom (isolate 0.305): 8.13,124.46 37.08,124.46 arc-90 38.35,123.19 38.35,81.03 arc90 39.62,79.76 54.86,79.76 arc90 56.13,81.03 56.13,123.19 arc-90 57.4,124.46 88.14,124.46 arc90 89.41,125.73 89.41,145.29 6.86,145.29 6.86,125.86 arc90
  pour Top (isolate 0.305): 56.13,123.19 56.13,81.03 arc-90 54.86,79.76 39.62,79.76 arc-90 38.35,81.03 38.35,123.19 arc90 37.08,124.46 8.13,124.46 arc-90 6.86,125.86 6.86,145.29 89.41,145.29 89.41,125.73 arc-90 88.14,124.46 57.4,124.46 arc90
GND4  (via drill 0.38)
  other vias: 135.13,85.09 137.67,85.09 168.66,141.48 168.15,129.16 169.16,126.24 160.27,125.48 100.58,140.97 98.81,140.97 102.87,135.13 99.82,125.48 96.77,134.11 105.16,140.72 141.73,100.33 166.75,127 103.12,132.84 109.73,140.46 109.73,135.38 118.87,127 112.52,127 96.77,125.48 96.77,128.52 96.77,131.57 102.87,143.26 99.57,135.13 107.44,141.48 107.44,132.33 106.43,127.25 155.7,125.48 165.61,125.48 173.48,125.48 173.48,144.27 168.66,144.27 164.85,144.27 124.21,127.25 121.16,127 167.51,136.91 165.74,140.21 142.49,89.92 142.49,92.2 144.02,80.77 128.27,80.77 136.4,80.77 150.62,127.25 145.29,131.06 143,126.49 138.68,131.57 134.11,131.83 124.97,131.83 120.4,131.83 176.28,132.59 176.28,135.13 176.28,137.67
  pour Bottom (isolate 0.305): 97.03,124.46 125.98,124.46 arc-90 127.25,123.19 127.25,81.03 arc90 128.52,79.76 143.76,79.76 arc90 145.03,81.03 145.03,123.19 arc-90 146.3,124.46 177.04,124.46 arc90 178.31,125.73 178.31,145.29 95.76,145.29 95.76,125.86 arc90
  pour Top (isolate 0.305): 145.03,123.19 145.03,81.03 arc-90 143.76,79.76 128.52,79.76 arc-90 127.25,81.03 127.25,123.19 arc90 125.98,124.46 97.03,124.46 arc-90 95.76,125.86 95.76,145.29 178.31,145.29 178.31,125.73 arc-90 177.04,124.46 146.3,124.46 arc90
GND5  (via drill 0.38)
  other vias: 224.03,85.09 226.57,85.09 257.56,141.48 257.05,129.16 258.06,126.24 249.17,125.48 189.48,140.97 187.71,140.97 191.77,135.13 188.72,125.48 185.67,134.11 194.06,140.72 230.63,100.33 255.65,127 192.02,132.84 198.63,140.46 198.63,135.38 207.77,127 201.42,127 185.67,125.48 185.67,128.52 185.67,131.57 191.77,143.26 188.47,135.13 196.34,141.48 196.34,132.33 195.33,127.25 244.6,125.48 254.51,125.48 262.38,125.48 262.38,144.27 257.56,144.27 253.75,144.27 213.11,127.25 210.06,127 256.41,136.91 254.63,140.21 231.39,89.92 231.39,92.2 232.92,80.77 217.17,80.77 225.3,80.77 239.52,127.25 234.19,131.06 231.9,126.49 227.58,131.57 223.01,131.83 213.87,131.83 209.3,131.83 265.18,132.59 265.18,135.13 265.18,137.67
  pour Bottom (isolate 0.305): 185.93,124.46 214.88,124.46 arc-90 216.15,123.19 216.15,81.03 arc90 217.42,79.76 232.66,79.76 arc90 233.93,81.03 233.93,123.19 arc-90 235.2,124.46 265.94,124.46 arc90 267.21,125.73 267.21,145.29 184.66,145.29 184.66,125.86 arc90
  pour Top (isolate 0.305): 233.93,123.19 233.93,81.03 arc-90 232.66,79.76 217.42,79.76 arc-90 216.15,81.03 216.15,123.19 arc90 214.88,124.46 185.93,124.46 arc-90 184.66,125.86 184.66,145.29 267.21,145.29 267.21,125.73 arc-90 265.94,124.46 235.2,124.46 arc90
GP1  (via drill 0.38)
  Top 0.254: JP7.11 137.41,33.78 138.68,32.51 v141.48,32.51 | v142.24,56.9 142.75,56.39 146.56,56.39 147.07,56.9 148.08,56.9 148.59,57.4 149.61,57.4 150.62,56.39 v153.92,56.39 | JP6.7 v152.91,66.04
  Bottom 0.254: v141.48,32.51 141.73,32.51 142.24,33.02 142.24,48.77 141.99,49.02 141.99,51.05 140.72,52.32 140.72,54.36 141.73,55.37 141.73,56.39 v142.24,56.9 | v153.92,56.39 153.92,63.75 152.91,64.77 v152.91,66.04
GP2  (via drill 0.38)
  Top 0.254: JP6.13 v145.29,66.04
  Bottom 0.254: JP8.8 141.99,26.16 142.75,26.92 142.75,51.56 147.32,56.13 147.32,64.01 v145.29,66.04
GP3  (via drill 0.38)
  Top 0.254: JP8.10 135.13,31.24 v134.87,30.99 | v134.37,65.28 135.13,64.52 JP6.22
  Bottom 0.254: v134.87,30.99 136.65,32.77 136.65,51.31 135.38,52.58 135.38,56.13 134.62,56.9 134.62,57.4 136.14,58.93 136.14,64.52 135.38,65.28 v134.37,65.28
GP4  (via drill 0.38)
  Top 0.254: JP3.11 48.51,33.78 49.78,32.51 v52.58,32.51 | v53.34,56.9 53.85,56.39 57.66,56.39 58.17,56.9 59.18,56.9 59.69,57.4 60.71,57.4 61.72,56.39 v65.02,56.39 | JP2.7 v64.01,66.04
  Bottom 0.254: v52.58,32.51 52.83,32.51 53.34,33.02 53.34,48.77 53.09,49.02 53.09,51.05 51.82,52.32 51.82,54.36 52.83,55.37 52.83,56.39 v53.34,56.9 | v65.02,56.39 65.02,63.75 64.01,64.77 v64.01,66.04
GP5  (via drill 0.38)
  Top 0.254: JP3.12 40.89,36.32 40.13,37.08 40.13,52.32 v39.12,53.34 | JP2.29 v36.07,66.04
  Bottom 0.254: v36.07,66.04 38.1,64.01 38.1,58.67 39.12,57.66 v39.12,53.34
GP6  (via drill 0.38)
  Top 0.254: JP3.13 41.4,38.86 40.64,39.62 40.64,53.09 39.37,54.36 38.1,54.36 v37.59,53.85 | JP2.31 v33.53,66.04
  Bottom 0.254: v33.53,66.04 34.8,66.04 37.59,63.25 37.59,58.42 38.61,57.4 38.61,54.86 v37.59,53.85
GP7  (via drill 0.38)
  Top 0.254: JP8.11 141.99,33.78 142.24,34.04 142.24,52.07 v141.73,52.58 | JP6.18 140.21,58.42 140.46,58.17 v142.24,58.17
  Bottom 0.254: v141.73,52.58 141.48,52.58 141.22,52.83 141.22,54.1 143.26,56.13 143.26,57.15 v142.24,58.17
GP8  (via drill 0.38)
  Top 0.254: JP6.16 v142.75,65.02
  Bottom 0.254: JP8.12 140.97,36.32 141.73,37.08 141.73,48.51 141.48,48.77 141.48,50.8 140.21,52.07 140.21,54.61 141.22,55.63 141.22,64.01 142.24,65.02 v142.75,65.02
GP9  (via drill 0.38)
  Top 0.254: JP8.13 141.48,38.86 141.73,39.12 141.73,49.53 140.97,50.29 140.72,50.29 v140.21,50.8 | JP6.15 v142.75,66.29
  Bottom 0.254: v140.21,50.8 139.7,51.31 139.7,54.86 140.72,55.88 140.72,64.26 v142.75,66.29
GP10  (via drill 0.38)
  Top 0.254: v139.7,56.39 140.21,55.88 146.81,55.88 147.32,56.39 v148.84,56.39 | v148.84,65.28 148.34,65.28 147.83,64.77 JP6.12
  Bottom 0.254: JP8.17 139.95,49.02 139.19,49.78 139.19,55.12 139.7,55.63 v139.7,56.39 | v148.84,56.39 148.34,56.9 148.34,64.77 v148.84,65.28
GP11  (via drill 0.38)
  Top 0.254: JP6.11 v147.83,66.04 | v133.1,54.61 v147.83,54.61
  Bottom 0.254: JP7.17 132.59,54.1 v133.1,54.61 | v147.83,66.04 v147.83,54.61
GP12  (via drill 0.38)
  Top 0.254: JP3.14 42.42,41.4 41.66,42.16 41.66,53.59 39.88,55.37 34.04,55.37 v33.53,54.86 | JP2.32 v33.53,58.93
  Bottom 0.254: v33.53,58.93 v33.53,54.86
GP13  (via drill 0.38)
  Top 0.254: JP2.33 v30.99,66.04 | v27.43,57.15 28.19,57.91 40.39,57.91 40.89,58.42 41.66,58.42 42.93,57.15 44.2,57.15 v45.21,56.13
  Bottom 0.254: JP3.15 46.48,43.94 47.24,44.7 47.24,51.05 45.97,52.32 45.97,55.37 v45.21,56.13 | v30.99,66.04 26.92,61.98 26.92,57.66 v27.43,57.15
GP14  (via drill 0.38)
  Top 0.254: JP7.12 129.79,36.32 129.03,37.08 129.03,52.32 v128.02,53.34 | JP6.29 v124.97,66.04
  Bottom 0.254: v124.97,66.04 127,64.01 127,58.67 128.02,57.66 v128.02,53.34
GP15  (via drill 0.38)
  Top 0.254: JP7.13 130.3,38.86 129.54,39.62 129.54,53.09 128.27,54.36 127,54.36 v126.49,53.85 | JP6.31 v122.43,66.04
  Bottom 0.254: v122.43,66.04 123.7,66.04 126.49,63.25 126.49,58.42 127.51,57.4 127.51,54.86 v126.49,53.85
GP16  (via drill 0.38)
  Top 0.254: v44.7,53.59 43.94,53.59 40.64,56.9 29.72,56.9 v28.45,55.63 | JP2.36 v28.45,59.44
  Bottom 0.254: JP3.16 44.96,46.48 45.21,46.74 45.21,49.53 44.2,50.55 44.2,53.09 v44.7,53.59 | v28.45,59.44 v28.45,55.63
GP17  (via drill 0.38)
  Top 0.254: JP2.11 v58.93,66.04 | v44.2,54.61 v58.93,54.61
  Bottom 0.254: JP3.17 43.69,54.1 v44.2,54.61 | v58.93,66.04 v58.93,54.61
GP18  (via drill 0.38)
  Top 0.254: v50.8,56.39 51.31,55.88 57.91,55.88 58.42,56.39 v59.94,56.39 | v59.94,65.28 59.44,65.28 58.93,64.77 JP2.12
  Bottom 0.254: JP4.17 51.05,49.02 50.29,49.78 50.29,55.12 50.8,55.63 v50.8,56.39 | v59.94,56.39 59.44,56.9 59.44,64.77 v59.94,65.28
GP19  (via drill 0.38)
  Top 0.254: JP4.16 v46.23,46.48 | JP2.35 v28.45,66.04 | v26.42,54.61 28.96,54.61 30.73,56.39 40.39,56.39 v45.47,51.31
  Bottom 0.254: v28.45,66.04 26.42,64.01 26.42,56.9 26.92,56.39 26.92,55.88 26.42,55.37 v26.42,54.61 | v45.47,51.31 46.23,50.55 v46.23,46.48
GP20  (via drill 0.38)
  Top 0.254: JP4.15 48.51,43.94 47.24,42.67 42.67,42.67 42.16,43.18 42.16,53.85 40.13,55.88 32.77,55.88 v32.26,55.37 | JP2.38 25.91,59.18 26.67,58.42 28.96,58.42 v29.46,58.93
  Bottom 0.254: v32.26,55.37 29.46,58.17 v29.46,58.93
GP21
  Top 0.254: JP4.14 48.51,41.4 47.24,40.13 42.16,40.13 41.15,41.15 41.15,53.34 39.62,54.86 37.34,54.86 35.56,53.09 24.89,53.09 24.64,53.34 24.64,58.67 23.37,59.94 JP2.40
GP22  (via drill 0.38)
  Top 0.254: JP4.13 52.58,38.86 52.83,39.12 52.83,49.53 52.07,50.29 51.82,50.29 v51.31,50.8 | JP2.15 v53.85,66.29
  Bottom 0.254: v51.31,50.8 50.8,51.31 50.8,54.86 51.82,55.88 51.82,64.26 v53.85,66.29
GP23  (via drill 0.38)
  Top 0.254: JP2.16 v53.85,65.02
  Bottom 0.254: JP4.12 52.07,36.32 52.83,37.08 52.83,48.51 52.58,48.77 52.58,50.8 51.31,52.07 51.31,54.61 52.32,55.63 52.32,64.01 53.34,65.02 v53.85,65.02
GP24  (via drill 0.38)
  Top 0.254: JP4.11 53.09,33.78 53.34,34.04 53.34,52.07 v52.83,52.58 | JP2.18 51.31,58.42 51.56,58.17 v53.34,58.17
  Bottom 0.254: v52.83,52.58 52.58,52.58 52.32,52.83 52.32,54.1 54.36,56.13 54.36,57.15 v53.34,58.17
GP25  (via drill 0.38)
  Top 0.254: JP4.10 46.23,31.24 v45.97,30.99 | v45.47,65.28 46.23,64.52 JP2.22
  Bottom 0.254: v45.97,30.99 47.75,32.77 47.75,51.31 46.48,52.58 46.48,56.13 45.72,56.9 45.72,57.4 47.24,58.93 47.24,64.52 46.48,65.28 v45.47,65.28
GP26  (via drill 0.38)
  Top 0.254: JP4.9 50.55,28.7 49.78,27.94 49.78,25.4 49.28,24.89 v48.77,24.89 | v41.4,57.4 28.96,57.4 27.69,56.13 v25.91,56.13 | JP2.37 v25.91,66.04
  Bottom 0.254: v48.77,24.89 41.66,24.89 41.15,25.4 41.15,50.04 42.16,51.05 42.16,53.09 41.66,53.59 41.66,57.15 v41.4,57.4 | v25.91,56.13 v25.91,66.04
GP27  (via drill 0.38)
  Top 0.254: JP2.13 v56.39,66.04
  Bottom 0.254: JP4.8 53.09,26.16 53.85,26.92 53.85,51.56 58.42,56.13 58.42,64.01 v56.39,66.04
GP28  (via drill 0.38)
  Top 0.254: JP7.14 131.32,41.4 130.56,42.16 130.56,53.59 128.78,55.37 122.94,55.37 v122.43,54.86 | JP6.32 v122.43,58.93
  Bottom 0.254: v122.43,58.93 v122.43,54.86
GP29  (via drill 0.38)
  Top 0.254: JP6.33 v119.89,66.04 | v116.33,57.15 117.09,57.91 129.29,57.91 129.79,58.42 130.56,58.42 131.83,57.15 133.1,57.15 v134.11,56.13
  Bottom 0.254: JP7.15 135.38,43.94 136.14,44.7 136.14,51.05 134.87,52.32 134.87,55.37 v134.11,56.13 | v119.89,66.04 115.82,61.98 115.82,57.66 v116.33,57.15
GP30  (via drill 0.38)
  Top 0.254: v133.6,53.59 132.84,53.59 129.54,56.9 118.62,56.9 v117.35,55.63 | JP6.36 v117.35,59.44
  Bottom 0.254: JP7.16 133.86,46.48 134.11,46.74 134.11,49.53 133.1,50.55 133.1,53.09 v133.6,53.59 | v117.35,59.44 v117.35,55.63
GP31  (via drill 0.38)
  Top 0.254: JP8.16 v135.13,46.48 | JP6.35 v117.35,66.04 | v115.32,54.61 117.86,54.61 119.63,56.39 129.29,56.39 v134.37,51.31
  Bottom 0.254: v117.35,66.04 115.32,64.01 115.32,56.9 115.82,56.39 115.82,55.88 115.32,55.37 v115.32,54.61 | v134.37,51.31 135.13,50.55 v135.13,46.48
GP32  (via drill 0.38)
  Top 0.254: JP8.15 137.41,43.94 136.14,42.67 131.57,42.67 131.06,43.18 131.06,53.85 129.03,55.88 121.67,55.88 v121.16,55.37 | JP6.38 114.81,59.18 115.57,58.42 117.86,58.42 v118.36,58.93
  Bottom 0.254: v121.16,55.37 118.36,58.17 v118.36,58.93
GP33
  Top 0.254: JP8.14 137.41,41.4 136.14,40.13 131.06,40.13 130.05,41.15 130.05,53.34 128.52,54.86 126.24,54.86 124.46,53.09 113.79,53.09 113.54,53.34 113.54,58.67 112.27,59.94 JP6.40
GP34  (via drill 0.38)
  Top 0.254: JP8.9 139.45,28.7 138.68,27.94 138.68,25.4 138.18,24.89 v137.67,24.89 | v130.3,57.4 117.86,57.4 116.59,56.13 v114.81,56.13 | JP6.37 v114.81,66.04
  Bottom 0.254: v137.67,24.89 130.56,24.89 130.05,25.4 130.05,50.04 131.06,51.05 131.06,53.09 130.56,53.59 130.56,57.15 v130.3,57.4 | v114.81,56.13 v114.81,66.04
GP35  (via drill 0.38)
  Top 0.254: JP11.11 226.31,33.78 227.58,32.51 v230.38,32.51 | v231.14,56.9 231.65,56.39 235.46,56.39 235.97,56.9 236.98,56.9 237.49,57.4 238.51,57.4 239.52,56.39 v242.82,56.39 | JP10.7 v241.81,66.04
  Bottom 0.254: v230.38,32.51 230.63,32.51 231.14,33.02 231.14,48.77 230.89,49.02 230.89,51.05 229.62,52.32 229.62,54.36 230.63,55.37 230.63,56.39 v231.14,56.9 | v242.82,56.39 242.82,63.75 241.81,64.77 v241.81,66.04
GP36  (via drill 0.38)
  Top 0.254: JP10.13 v234.19,66.04
  Bottom 0.254: JP12.8 230.89,26.16 231.65,26.92 231.65,51.56 236.22,56.13 236.22,64.01 v234.19,66.04
GP37  (via drill 0.38)
  Top 0.254: JP12.10 224.03,31.24 v223.77,30.99 | v223.27,65.28 224.03,64.52 JP10.22
  Bottom 0.254: v223.77,30.99 225.55,32.77 225.55,51.31 224.28,52.58 224.28,56.13 223.52,56.9 223.52,57.4 225.04,58.93 225.04,64.52 224.28,65.28 v223.27,65.28
GP38  (via drill 0.38)
  Top 0.254: JP12.11 230.89,33.78 231.14,34.04 231.14,52.07 v230.63,52.58 | JP10.18 229.11,58.42 229.36,58.17 v231.14,58.17
  Bottom 0.254: v230.63,52.58 230.38,52.58 230.12,52.83 230.12,54.1 232.16,56.13 232.16,57.15 v231.14,58.17
GP39  (via drill 0.38)
  Top 0.254: JP10.16 v231.65,65.02
  Bottom 0.254: JP12.12 229.87,36.32 230.63,37.08 230.63,48.51 230.38,48.77 230.38,50.8 229.11,52.07 229.11,54.61 230.12,55.63 230.12,64.01 231.14,65.02 v231.65,65.02
GP40  (via drill 0.38)
  Top 0.254: JP12.13 230.38,38.86 230.63,39.12 230.63,49.53 229.87,50.29 229.62,50.29 v229.11,50.8 | JP10.15 v231.65,66.29
  Bottom 0.254: v229.11,50.8 228.6,51.31 228.6,54.86 229.62,55.88 229.62,64.26 v231.65,66.29
GP41  (via drill 0.38)
  Top 0.254: v228.6,56.39 229.11,55.88 235.71,55.88 236.22,56.39 v237.74,56.39 | v237.74,65.28 237.24,65.28 236.73,64.77 JP10.12
  Bottom 0.254: JP12.17 228.85,49.02 228.09,49.78 228.09,55.12 228.6,55.63 v228.6,56.39 | v237.74,56.39 237.24,56.9 237.24,64.77 v237.74,65.28
GP42  (via drill 0.38)
  Top 0.254: JP10.11 v236.73,66.04 | v222,54.61 v236.73,54.61
  Bottom 0.254: JP11.17 221.49,54.1 v222,54.61 | v236.73,66.04 v236.73,54.61
GP43  (via drill 0.38)
  Top 0.254: JP11.12 218.69,36.32 217.93,37.08 217.93,52.32 v216.92,53.34 | JP10.29 v213.87,66.04
  Bottom 0.254: v213.87,66.04 215.9,64.01 215.9,58.67 216.92,57.66 v216.92,53.34
GP44  (via drill 0.38)
  Top 0.254: JP11.13 219.2,38.86 218.44,39.62 218.44,53.09 217.17,54.36 215.9,54.36 v215.39,53.85 | JP10.31 v211.33,66.04
  Bottom 0.254: v211.33,66.04 212.6,66.04 215.39,63.25 215.39,58.42 216.41,57.4 216.41,54.86 v215.39,53.85
GP45  (via drill 0.38)
  Top 0.254: JP11.14 220.22,41.4 219.46,42.16 219.46,53.59 217.68,55.37 211.84,55.37 v211.33,54.86 | JP10.32 v211.33,58.93
  Bottom 0.254: v211.33,58.93 v211.33,54.86
GP46  (via drill 0.38)
  Top 0.254: JP10.33 v208.79,66.04 | v205.23,57.15 205.99,57.91 218.19,57.91 218.69,58.42 219.46,58.42 220.73,57.15 222,57.15 v223.01,56.13
  Bottom 0.254: JP11.15 224.28,43.94 225.04,44.7 225.04,51.05 223.77,52.32 223.77,55.37 v223.01,56.13 | v208.79,66.04 204.72,61.98 204.72,57.66 v205.23,57.15
GP47  (via drill 0.38)
  Top 0.254: v222.5,53.59 221.74,53.59 218.44,56.9 207.52,56.9 v206.25,55.63 | JP10.36 v206.25,59.44
  Bottom 0.254: JP11.16 222.76,46.48 223.01,46.74 223.01,49.53 222,50.55 222,53.09 v222.5,53.59 | v206.25,59.44 v206.25,55.63
GP48  (via drill 0.38)
  Top 0.254: JP12.16 v224.03,46.48 | JP10.35 v206.25,66.04 | v204.22,54.61 206.76,54.61 208.53,56.39 218.19,56.39 v223.27,51.31
  Bottom 0.254: v206.25,66.04 204.22,64.01 204.22,56.9 204.72,56.39 204.72,55.88 204.22,55.37 v204.22,54.61 | v223.27,51.31 224.03,50.55 v224.03,46.48
GP49  (via drill 0.38)
  Top 0.254: JP12.15 226.31,43.94 225.04,42.67 220.47,42.67 219.96,43.18 219.96,53.85 217.93,55.88 210.57,55.88 v210.06,55.37 | JP10.38 203.71,59.18 204.47,58.42 206.76,58.42 v207.26,58.93
  Bottom 0.254: v210.06,55.37 207.26,58.17 v207.26,58.93
GP50
  Top 0.254: JP12.14 226.31,41.4 225.04,40.13 219.96,40.13 218.95,41.15 218.95,53.34 217.42,54.86 215.14,54.86 213.36,53.09 202.69,53.09 202.44,53.34 202.44,58.67 201.17,59.94 JP10.40
GP51  (via drill 0.38)
  Top 0.254: JP12.9 228.35,28.7 227.58,27.94 227.58,25.4 227.08,24.89 v226.57,24.89 | v219.2,57.4 206.76,57.4 205.49,56.13 v203.71,56.13 | JP10.37 v203.71,66.04
  Bottom 0.254: v226.57,24.89 219.46,24.89 218.95,25.4 218.95,50.04 219.96,51.05 219.96,53.09 219.46,53.59 219.46,57.15 v219.2,57.4 | v203.71,56.13 v203.71,66.04
GP52  (via drill 0.38)
  Top 0.254: JP15.11 48.51,106.68 49.78,105.41 v52.58,105.41 | v53.34,129.79 53.85,129.29 57.66,129.29 58.17,129.79 59.18,129.79 59.69,130.3 60.71,130.3 61.72,129.29 v65.02,129.29 | JP14.7 v64.01,138.94
  Bottom 0.254: v52.58,105.41 52.83,105.41 53.34,105.92 53.34,121.67 53.09,121.92 53.09,123.95 51.82,125.22 51.82,127.25 52.83,128.27 52.83,129.29 v53.34,129.79 | v65.02,129.29 65.02,136.65 64.01,137.67 v64.01,138.94
GP53  (via drill 0.38)
  Top 0.254: JP14.13 v56.39,138.94
  Bottom 0.254: JP16.8 53.09,99.06 53.85,99.82 53.85,124.46 58.42,129.03 58.42,136.91 v56.39,138.94
GP54  (via drill 0.38)
  Top 0.254: JP16.10 46.23,104.14 v45.97,103.89 | v45.47,138.18 46.23,137.41 JP14.22
  Bottom 0.254: v45.97,103.89 47.75,105.66 47.75,124.21 46.48,125.48 46.48,129.03 45.72,129.79 45.72,130.3 47.24,131.83 47.24,137.41 46.48,138.18 v45.47,138.18
GP55  (via drill 0.38)
  Top 0.254: JP16.11 53.09,106.68 53.34,106.93 53.34,124.97 v52.83,125.48 | JP14.18 51.31,131.32 51.56,131.06 v53.34,131.06
  Bottom 0.254: v52.83,125.48 52.58,125.48 52.32,125.73 52.32,127 54.36,129.03 54.36,130.05 v53.34,131.06
GP56  (via drill 0.38)
  Top 0.254: JP14.16 v53.85,137.92
  Bottom 0.254: JP16.12 52.07,109.22 52.83,109.98 52.83,121.41 52.58,121.67 52.58,123.7 51.31,124.97 51.31,127.51 52.32,128.52 52.32,136.91 53.34,137.92 v53.85,137.92
GP57  (via drill 0.38)
  Top 0.254: JP16.13 52.58,111.76 52.83,112.01 52.83,122.43 52.07,123.19 51.82,123.19 v51.31,123.7 | JP14.15 v53.85,139.19
  Bottom 0.254: v51.31,123.7 50.8,124.21 50.8,127.76 51.82,128.78 51.82,137.16 v53.85,139.19
GP58  (via drill 0.38)
  Top 0.254: v50.8,129.29 51.31,128.78 57.91,128.78 58.42,129.29 v59.94,129.29 | v59.94,138.18 59.44,138.18 58.93,137.67 JP14.12
  Bottom 0.254: JP16.17 51.05,121.92 50.29,122.68 50.29,128.02 50.8,128.52 v50.8,129.29 | v59.94,129.29 59.44,129.79 59.44,137.67 v59.94,138.18
GP59  (via drill 0.38)
  Top 0.254: JP14.11 v58.93,138.94 | v44.2,127.51 v58.93,127.51
  Bottom 0.254: JP15.17 43.69,127 v44.2,127.51 | v58.93,138.94 v58.93,127.51
GP60  (via drill 0.38)
  Top 0.254: JP15.12 40.89,109.22 40.13,109.98 40.13,125.22 v39.12,126.24 | JP14.29 v36.07,138.94
  Bottom 0.254: v36.07,138.94 38.1,136.91 38.1,131.57 39.12,130.56 v39.12,126.24
GP61  (via drill 0.38)
  Top 0.254: JP15.13 41.4,111.76 40.64,112.52 40.64,125.98 39.37,127.25 38.1,127.25 v37.59,126.75 | JP14.31 v33.53,138.94
  Bottom 0.254: v33.53,138.94 34.8,138.94 37.59,136.14 37.59,131.32 38.61,130.3 38.61,127.76 v37.59,126.75
GP62  (via drill 0.38)
  Top 0.254: JP15.14 42.42,114.3 41.66,115.06 41.66,126.49 39.88,128.27 34.04,128.27 v33.53,127.76 | JP14.32 v33.53,131.83
  Bottom 0.254: v33.53,131.83 v33.53,127.76
GP63  (via drill 0.38)
  Top 0.254: JP14.33 v30.99,138.94 | v27.43,130.05 28.19,130.81 40.39,130.81 40.89,131.32 41.66,131.32 42.93,130.05 44.2,130.05 v45.21,129.03
  Bottom 0.254: JP15.15 46.48,116.84 47.24,117.6 47.24,123.95 45.97,125.22 45.97,128.27 v45.21,129.03 | v30.99,138.94 26.92,134.87 26.92,130.56 v27.43,130.05
GP64  (via drill 0.38)
  Top 0.254: v44.7,126.49 43.94,126.49 40.64,129.79 29.72,129.79 v28.45,128.52 | JP14.36 v28.45,132.33
  Bottom 0.254: JP15.16 44.96,119.38 45.21,119.63 45.21,122.43 44.2,123.44 44.2,125.98 v44.7,126.49 | v28.45,132.33 v28.45,128.52
GP65  (via drill 0.38)
  Top 0.254: JP16.16 v46.23,119.38 | JP14.35 v28.45,138.94 | v26.42,127.51 28.96,127.51 30.73,129.29 40.39,129.29 v45.47,124.21
  Bottom 0.254: v28.45,138.94 26.42,136.91 26.42,129.79 26.92,129.29 26.92,128.78 26.42,128.27 v26.42,127.51 | v45.47,124.21 46.23,123.44 v46.23,119.38
GP66  (via drill 0.38)
  Top 0.254: JP16.15 48.51,116.84 47.24,115.57 42.67,115.57 42.16,116.08 42.16,126.75 40.13,128.78 32.77,128.78 v32.26,128.27 | JP14.38 25.91,132.08 26.67,131.32 28.96,131.32 v29.46,131.83
  Bottom 0.254: v32.26,128.27 29.46,131.06 v29.46,131.83
GP67
  Top 0.254: JP16.14 48.51,114.3 47.24,113.03 42.16,113.03 41.15,114.05 41.15,126.24 39.62,127.76 37.34,127.76 35.56,125.98 24.89,125.98 24.64,126.24 24.64,131.57 23.37,132.84 JP14.40
GP68  (via drill 0.38)
  Top 0.254: JP16.9 50.55,101.6 49.78,100.84 49.78,98.3 49.28,97.79 v48.77,97.79 | v41.4,130.3 28.96,130.3 27.69,129.03 v25.91,129.03 | JP14.37 v25.91,138.94
  Bottom 0.254: v48.77,97.79 41.66,97.79 41.15,98.3 41.15,122.94 42.16,123.95 42.16,125.98 41.66,126.49 41.66,130.05 v41.4,130.3 | v25.91,129.03 v25.91,138.94
GP69  (via drill 0.38)
  Top 0.254: JP19.11 137.41,106.68 138.68,105.41 v141.48,105.41 | v142.24,129.79 142.75,129.29 146.56,129.29 147.07,129.79 148.08,129.79 148.59,130.3 149.61,130.3 150.62,129.29 v153.92,129.29 | JP18.7 v152.91,138.94
  Bottom 0.254: v141.48,105.41 141.73,105.41 142.24,105.92 142.24,121.67 141.99,121.92 141.99,123.95 140.72,125.22 140.72,127.25 141.73,128.27 141.73,129.29 v142.24,129.79 | v153.92,129.29 153.92,136.65 152.91,137.67 v152.91,138.94
GP70  (via drill 0.38)
  Top 0.254: JP18.13 v145.29,138.94
  Bottom 0.254: JP20.8 141.99,99.06 142.75,99.82 142.75,124.46 147.32,129.03 147.32,136.91 v145.29,138.94
GP71  (via drill 0.38)
  Top 0.254: JP20.10 135.13,104.14 v134.87,103.89 | v134.37,138.18 135.13,137.41 JP18.22
  Bottom 0.254: v134.87,103.89 136.65,105.66 136.65,124.21 135.38,125.48 135.38,129.03 134.62,129.79 134.62,130.3 136.14,131.83 136.14,137.41 135.38,138.18 v134.37,138.18
GP72  (via drill 0.38)
  Top 0.254: JP20.11 141.99,106.68 142.24,106.93 142.24,124.97 v141.73,125.48 | JP18.18 140.21,131.32 140.46,131.06 v142.24,131.06
  Bottom 0.254: v141.73,125.48 141.48,125.48 141.22,125.73 141.22,127 143.26,129.03 143.26,130.05 v142.24,131.06
GP73  (via drill 0.38)
  Top 0.254: JP18.16 v142.75,137.92
  Bottom 0.254: JP20.12 140.97,109.22 141.73,109.98 141.73,121.41 141.48,121.67 141.48,123.7 140.21,124.97 140.21,127.51 141.22,128.52 141.22,136.91 142.24,137.92 v142.75,137.92
GP74  (via drill 0.38)
  Top 0.254: JP20.13 141.48,111.76 141.73,112.01 141.73,122.43 140.97,123.19 140.72,123.19 v140.21,123.7 | JP18.15 v142.75,139.19
  Bottom 0.254: v140.21,123.7 139.7,124.21 139.7,127.76 140.72,128.78 140.72,137.16 v142.75,139.19
GP75  (via drill 0.38)
  Top 0.254: v139.7,129.29 140.21,128.78 146.81,128.78 147.32,129.29 v148.84,129.29 | v148.84,138.18 148.34,138.18 147.83,137.67 JP18.12
  Bottom 0.254: JP20.17 139.95,121.92 139.19,122.68 139.19,128.02 139.7,128.52 v139.7,129.29 | v148.84,129.29 148.34,129.79 148.34,137.67 v148.84,138.18
GP76  (via drill 0.38)
  Top 0.254: JP18.11 v147.83,138.94 | v133.1,127.51 v147.83,127.51
  Bottom 0.254: JP19.17 132.59,127 v133.1,127.51 | v147.83,138.94 v147.83,127.51
GP77  (via drill 0.38)
  Top 0.254: JP19.12 129.79,109.22 129.03,109.98 129.03,125.22 v128.02,126.24 | JP18.29 v124.97,138.94
  Bottom 0.254: v124.97,138.94 127,136.91 127,131.57 128.02,130.56 v128.02,126.24
GP78  (via drill 0.38)
  Top 0.254: JP19.13 130.3,111.76 129.54,112.52 129.54,125.98 128.27,127.25 127,127.25 v126.49,126.75 | JP18.31 v122.43,138.94
  Bottom 0.254: v122.43,138.94 123.7,138.94 126.49,136.14 126.49,131.32 127.51,130.3 127.51,127.76 v126.49,126.75
GP79  (via drill 0.38)
  Top 0.254: JP19.14 131.32,114.3 130.56,115.06 130.56,126.49 128.78,128.27 122.94,128.27 v122.43,127.76 | JP18.32 v122.43,131.83
  Bottom 0.254: v122.43,131.83 v122.43,127.76
GP80  (via drill 0.38)
  Top 0.254: JP18.33 v119.89,138.94 | v116.33,130.05 117.09,130.81 129.29,130.81 129.79,131.32 130.56,131.32 131.83,130.05 133.1,130.05 v134.11,129.03
  Bottom 0.254: JP19.15 135.38,116.84 136.14,117.6 136.14,123.95 134.87,125.22 134.87,128.27 v134.11,129.03 | v119.89,138.94 115.82,134.87 115.82,130.56 v116.33,130.05
GP81  (via drill 0.38)
  Top 0.254: v133.6,126.49 132.84,126.49 129.54,129.79 118.62,129.79 v117.35,128.52 | JP18.36 v117.35,132.33
  Bottom 0.254: JP19.16 133.86,119.38 134.11,119.63 134.11,122.43 133.1,123.44 133.1,125.98 v133.6,126.49 | v117.35,132.33 v117.35,128.52
GP82  (via drill 0.38)
  Top 0.254: JP20.16 v135.13,119.38 | JP18.35 v117.35,138.94 | v115.32,127.51 117.86,127.51 119.63,129.29 129.29,129.29 v134.37,124.21
  Bottom 0.254: v117.35,138.94 115.32,136.91 115.32,129.79 115.82,129.29 115.82,128.78 115.32,128.27 v115.32,127.51 | v134.37,124.21 135.13,123.44 v135.13,119.38
GP83  (via drill 0.38)
  Top 0.254: JP20.15 137.41,116.84 136.14,115.57 131.57,115.57 131.06,116.08 131.06,126.75 129.03,128.78 121.67,128.78 v121.16,128.27 | JP18.38 114.81,132.08 115.57,131.32 117.86,131.32 v118.36,131.83
  Bottom 0.254: v121.16,128.27 118.36,131.06 v118.36,131.83
GP84
  Top 0.254: JP20.14 137.41,114.3 136.14,113.03 131.06,113.03 130.05,114.05 130.05,126.24 128.52,127.76 126.24,127.76 124.46,125.98 113.79,125.98 113.54,126.24 113.54,131.57 112.27,132.84 JP18.40
GP85  (via drill 0.38)
  Top 0.254: JP20.9 139.45,101.6 138.68,100.84 138.68,98.3 138.18,97.79 v137.67,97.79 | v130.3,130.3 117.86,130.3 116.59,129.03 v114.81,129.03 | JP18.37 v114.81,138.94
  Bottom 0.254: v137.67,97.79 130.56,97.79 130.05,98.3 130.05,122.94 131.06,123.95 131.06,125.98 130.56,126.49 130.56,130.05 v130.3,130.3 | v114.81,129.03 v114.81,138.94
GP86  (via drill 0.38)
  Top 0.254: JP23.11 226.31,106.68 227.58,105.41 v230.38,105.41 | v231.14,129.79 231.65,129.29 235.46,129.29 235.97,129.79 236.98,129.79 237.49,130.3 238.51,130.3 239.52,129.29 v242.82,129.29 | JP22.7 v241.81,138.94